# EAGLE board due-adaptor (EAGLE 6.4)
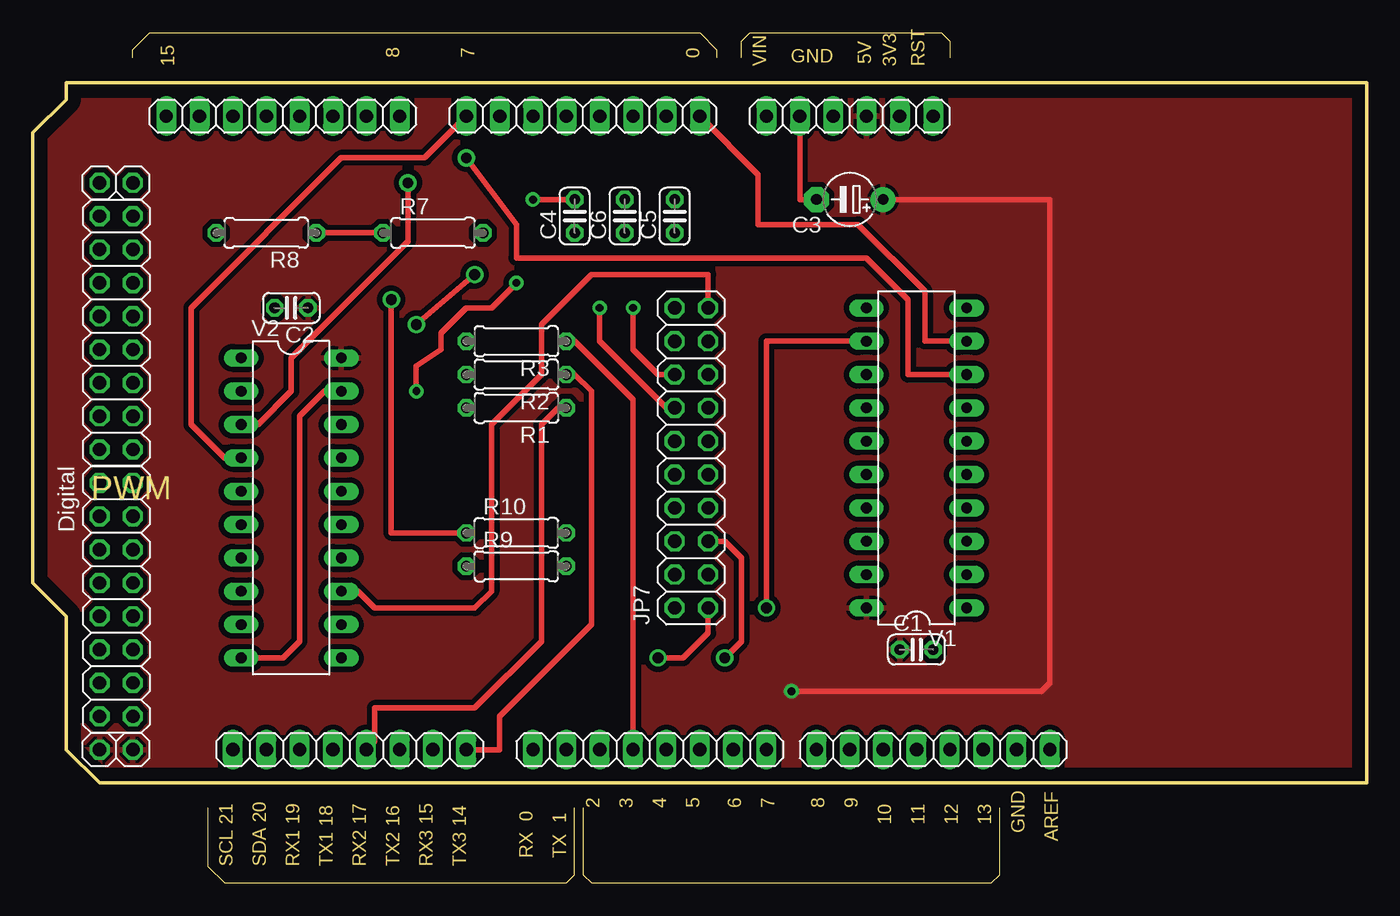
[diagram p0: board, top side]
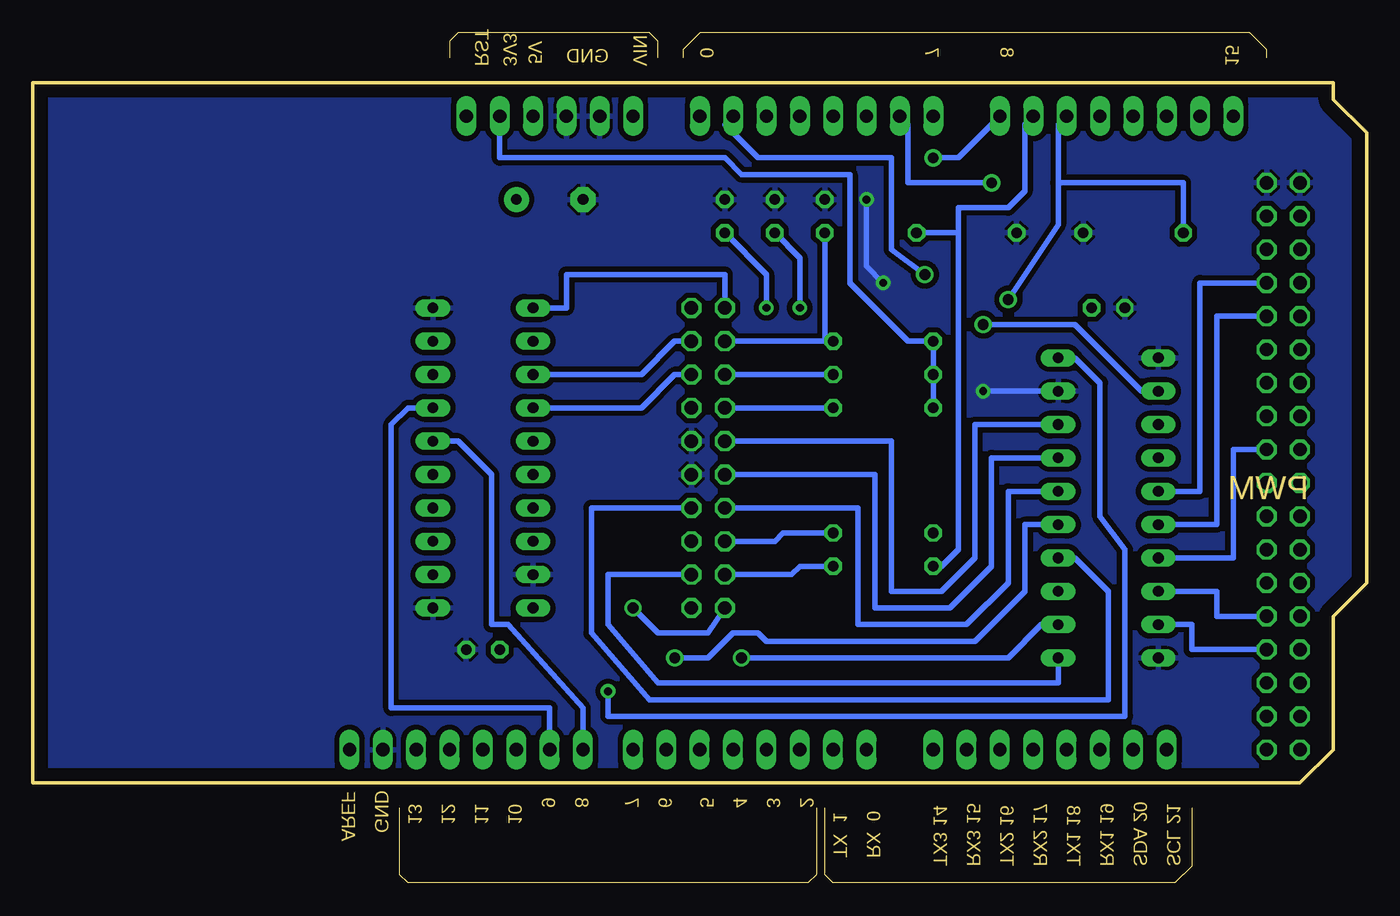
[diagram p1: board, bottom side, seen from below]

Size 101.6 x 64.77 mm. Coordinates in mm from the lower left corner, seen from the top.
Outline: 7.62,62.87 7.62,63.5 8.89,64.77 50.8,64.77 52.07,63.5 52.07,62.87
Outline: 53.98,62.87 53.98,64.14 54.61,64.77 69.22,64.77 69.85,64.14 69.85,62.87
Outline: 13.34,5.71 13.34,1.27 14.61,0 40.64,0 41.27,0.64 41.27,5.71
Outline: 41.91,5.71 41.91,0.64 42.55,0 73.03,0 73.66,0.64 73.66,5.71
Outline: 101.6,7.62 5.08,7.62 2.54,10.16 2.54,20.32 0,22.86 0,57.15 2.54,59.69 2.54,60.96 101.6,60.96 101.6,7.62
Copper layers (1*16): Top 0.035mm / dielectric 1.5mm / Bottom 0.035mm
Design rules "default *": minimum track width 16mil, minimum drill 32mil, track to track 16mil, track to pad 16mil, pad to pad 16mil, via to via 16mil, smd to smd 16mil, copper to edge 40mil, drill to drill 20mil, minimum pad ring 10mil, minimum via ring 10mil, stop-mask expansion 4mil, vias tented up to drill 0mil, thermal gap 10mil
Net classes: 0 default: width 0.203 mm, drill 0.406 mm, clearance 0.203 mm; 1 power: width 0.61 mm, drill 0.711 mm, clearance 0.203 mm; 2 gnd: width 0.305 mm, drill 0.711 mm, clearance 0.203 mm; 3 usbvcc: width 0.508 mm, drill 0.711 mm, clearance 0.203 mm

## Footprints (pad centres in the part's own frame; a part is rotated, then mirrored left to right if it is on the bottom)
1X08 = drill 1.016 long: 1 -8.89,0; 2 -6.35,0; 3 -3.81,0; 4 -1.27,0; 5 1.27,0; 6 3.81,0; 7 6.35,0; 8 8.89,0
C025-024X044 = drill 0.813 octagon: 1 -1.27,0; 2 1.27,0
E5-4 = drill 0.813 pad 1.905: + -2.54,0 | drill 0.813 pad 1.905 octagon: - 2.54,0
2X08 = drill 1.016 octagon: 1 -8.89,-1.27; 2 -8.89,1.27; 3 -6.35,-1.27; 4 -6.35,1.27; 5 -3.81,-1.27; 6 -3.81,1.27; 7 -1.27,-1.27; 8 -1.27,1.27; 9 1.27,-1.27; 10 1.27,1.27; 11 3.81,-1.27; 12 3.81,1.27; 13 6.35,-1.27; 14 6.35,1.27; 15 8.89,-1.27; 16 8.89,1.27
1X01 = drill 1.016 octagon: 1 0,0
2X10 = drill 1.016 octagon: 1 -11.43,-1.27; 2 -11.43,1.27; 3 -8.89,-1.27; 4 -8.89,1.27; 5 -6.35,-1.27; 6 -6.35,1.27; 7 -3.81,-1.27; 8 -3.81,1.27; 9 -1.27,-1.27; 10 -1.27,1.27; 11 1.27,-1.27; 12 1.27,1.27; 13 3.81,-1.27; 14 3.81,1.27; 15 6.35,-1.27; 16 6.35,1.27; 17 8.89,-1.27; 18 8.89,1.27; 19 11.43,-1.27; 20 11.43,1.27
1X06 = drill 1.016 long: 1 -6.35,0; 2 -3.81,0; 3 -1.27,0; 4 1.27,0; 5 3.81,0; 6 6.35,0
0207/7 = drill 0.813 octagon: 1 -3.81,0; 2 3.81,0
DIL20 = drill 0.813 long: 1 -11.43,-3.81; 2 -8.89,-3.81; 3 -6.35,-3.81; 4 -3.81,-3.81; 5 -1.27,-3.81; 6 1.27,-3.81; 7 3.81,-3.81; 8 6.35,-3.81; 9 8.89,-3.81; 10 11.43,-3.81; 11 11.43,3.81; 12 8.89,3.81; 13 6.35,3.81; 14 3.81,3.81; 15 1.27,3.81; 16 -1.27,3.81; 17 -3.81,3.81; 18 -6.35,3.81; 19 -8.89,3.81; 20 -11.43,3.81

## Placement (x,y rotation side)
ADC(H)  [1X08]  19.05,58.42 180 top
ADCL  [1X08]  41.91,58.42 180 top
C1  0.1uF  [C025-024X044]  67.31,17.78 0 top
C2  0.1uF  [C025-024X044]  19.68,43.81 180 top
C3  100uF  [E5-4]  62.23,52.07 180 top
C4  0.1uF  [C025-024X044]  41.27,50.8 90 top
C5  0.1uF  [C025-024X044]  48.89,50.8 90 top
C6  0.1uF  [C025-024X044]  45.09,50.8 90 top
COMMUNICATION  [1X08]  24.13,10.16 0 top
JP1  Digital  [2X08]  6.35,21.59 270 top
JP2  Digital  [2X08]  6.35,41.91 270 top
JP3  [1X01]  7.62,10.16 180 top
JP4  [1X01]  5.08,10.16 180 top
JP5  [1X01]  7.62,53.34 180 top
JP6  [1X01]  5.08,53.34 180 top
JP7  [2X10]  50.16,32.38 90 top
POWER  [1X06]  62.23,58.42 180 top
PWM(H)  [1X08]  68.58,10.16 0 top
PWM(L)  [1X08]  46.99,10.16 0 top
R1  47K  [0207/7]  36.83,36.2 180 top
R2  47K  [0207/7]  36.83,38.73 180 top
R3  47K  [0207/7]  36.83,41.27 180 top
R7  150K  [0207/7]  30.48,49.53 0 top
R8  150K  [0207/7]  17.78,49.53 180 top
R9  100K  [0207/7]  36.83,24.13 0 top
R10  100K  [0207/7]  36.83,26.67 0 top
V1  74HCT541N  [DIL20]  67.31,32.38 90 top
V2  74HCT541N  [DIL20]  19.68,28.57 270 top

## Library data of the parts
ADC(H) ADCL COMMUNICATION JP1-JP7 POWER PWM(H) PWM(L) = pinhead
C1-C6 R1-R3 R7-R10 = rcl
V1 V2 = 74ttl-din

## Nets
+3V3 [power]: POWER.2 R1.2 R2.2 R3.2
+5V [usbvcc]: C1.1 C2.1 C3.+ JP3.1 JP4.1 POWER.3 V1.20 V2.20
ADC0_XSTEP: ADCL.1 V1.9
ADC1_XDIR: ADCL.2 V2.2
ADC2: ADCL.3
ADC3: ADCL.4
ADC4: ADCL.5
ADC5: ADCL.6
ADC6_YSTEP: ADCL.7 V2.3
ADC7_YDIR: ADCL.8 V2.4
ADC8_Z_EN: ADC(H).1 V1.8
ADC9_BED_T: ADC(H).2 R7.2 R9.1
ADC10_E_T: ADC(H).3 R8.2 R10.1
ADC11: ADC(H).4
ADC12: ADC(H).5
ADC13: ADC(H).6
ADC14: ADC(H).7
ADC15: ADC(H).8
AREF: PWM(H).8
DIG22: JP1.16
DIG23: JP1.15
DIG24: JP1.14
DIG25: JP1.13
DIG26_ESTEP [gnd]: JP1.12 V2.9
DIG27: JP1.11
DIG28_EDIR: JP1.10 V2.8
DIG29: JP1.9
DIG30: JP1.8
DIG31: JP1.7
DIG32: JP1.6
DIG33: JP1.5
DIG34: JP1.4
DIG35: JP1.3
DIG36: JP1.2
DIG37: JP1.1
DIG38_XYE_EN: JP2.16 V2.7
DIG39: JP2.15
DIG40: JP2.14
DIG41: JP2.13
DIG42: JP2.12
DIG43: JP2.11
DIG44: JP2.10
DIG45: JP2.9
DIG46_ZSTEP: JP2.8 V2.6
DIG47: JP2.7
DIG48_ZDIR: JP2.6 V2.5
DIG49: JP2.5
DIG50: JP2.4
DIG51: JP2.3
DIG52: JP2.2
DIG53: JP2.1
GND [gnd]: C1.2 C2.2 C3.- C4.2 C5.2 C6.2 JP5.1 JP6.1 JP7.9 JP7.11 POWER.4 POWER.5 PWM(H).7 R7.1 R8.1 V1.1 V1.10 V1.19 V2.1 V2.10 V2.19
N$7: JP7.13
PWM00: PWM(L).1
PWM01: PWM(L).2
PWM02: PWM(L).3
PWM03_XSTOP: C4.1 JP7.18 PWM(L).4 R3.1
PWM04: PWM(L).5
PWM05: PWM(L).6
PWM06: PWM(L).7
PWM07: PWM(L).8
PWM08_BED_H: PWM(H).1 V1.6
PWM09_E_H: PWM(H).2 V1.7
PWM10: PWM(H).3
PWM11: PWM(H).4
PWM12: PWM(H).5
PWM13: PWM(H).6
RESET: POWER.1
RX1_D19: COMMUNICATION.3
RX2_D17_ZSTOP: C6.1 COMMUNICATION.5 JP7.14 R1.1
RX3_D15: COMMUNICATION.7
RX4_D14_YSTOP: C5.1 COMMUNICATION.8 JP7.16 R2.1
S_BED_H: JP7.15 V1.14
S_BED_T: JP7.4 R9.2
S_E_H: JP7.17 V1.13
S_E_T: JP7.6 R10.2
S_EDIR: JP7.1 V2.12
S_ESTEP: JP7.3 V2.11
S_XDIR: JP7.12 V2.18
S_XSTEP: JP7.20 V1.11
S_XYE_EN: JP7.19 V2.13
S_YDIR: JP7.8 V2.16
S_YSTEP: JP7.10 V2.17
S_Z_EN: JP7.2 V1.12
S_ZDIR: JP7.5 V2.15
S_ZSTEP: JP7.7 V2.14
SCL_D21: COMMUNICATION.1
SDA_D20: COMMUNICATION.2
TX1_D18: COMMUNICATION.4
TX2_D16: COMMUNICATION.6
VIN [power]: POWER.6

## Tracks (layer width: path | path; a pad name or v marks a point on that pad's centre or on a via)
+3V3
  Bottom 0.406: R1.2 R2.2 R3.2 34.92,41.27 39.37,45.72 39.37,53.98 47.62,53.98 48.89,55.24 66.04,55.24 POWER.2
+5V  (via drill 0.6)
  Top 0.406: C3.+ 77.47,52.07 77.47,15.24 76.83,14.61 v57.78,14.61
  Bottom 0.406: v57.78,14.61 57.78,12.7 18.41,12.7 18.41,25.4 20.32,27.94 20.32,38.1 22.22,40.01 V2.20
  pour Top: -1.27,60.96 -1.27,6.99 103.5,6.99 103.5,60.96
ADC0_XSTEP
  Top 0.406: V1.9 67.94,41.27 67.94,45.09 62.86,50.16 55.24,50.16 55.24,53.98 ADCL.1
ADC1_XDIR  (via drill 0.81)
  Top 0.406: v33.66,46.35 v29.21,42.55
  Bottom 0.406: V2.2 17.14,37.47 22.22,42.55 v29.21,42.55 | ADCL.2 48.89,57.78 46.35,55.24 36.2,55.24 36.2,48.26 v33.66,46.35
ADC6_YSTEP  (via drill 0.81)
  Top 0.406: V2.3 17.14,34.93 19.68,37.47 19.68,40.01 28.57,48.89 v28.57,53.34
  Bottom 0.406: v28.57,53.34 34.92,53.34 34.92,57.78 ADCL.7
ADC7_YDIR
  Top 0.406: V2.4 14.61,32.38 12.07,34.93 12.07,43.81 23.49,55.24 29.84,55.24 ADCL.8
ADC8_Z_EN  (via drill 0.81)
  Top 0.406: V1.8 66.67,38.73 66.67,44.45 63.5,47.62 36.83,47.62 36.83,50.16 v33.02,55.24
  Bottom 0.406: ADC(H).1 31.12,55.24 v33.02,55.24
ADC9_BED_T
  Bottom 0.406: 31.12,49.53 31.12,51.44 27.3,51.44 26.04,52.7 26.04,57.78 ADC(H).2 | 31.12,49.53 31.12,25.4 32.38,24.13 R9.1 | R7.2 31.12,49.53
ADC10_E_T  (via drill 0.81)
  Top 0.406: R10.1 27.3,26.67 v27.3,44.45
  Bottom 0.406: v27.3,44.45 23.49,50.16 23.49,53.34 | 23.49,53.34 23.49,57.78 ADC(H).3 | R8.2 13.97,53.34 23.49,53.34
DIG26_ESTEP
  Bottom 0.406: JP1.12 13.34,17.78 13.34,19.68 V2.9
DIG28_EDIR
  Bottom 0.406: JP1.10 11.43,20.32 11.43,22.23 V2.8
DIG38_XYE_EN
  Bottom 0.406: V2.7 10.16,24.77 10.16,33.02 JP2.16
DIG46_ZSTEP
  Bottom 0.406: V2.6 11.43,27.3 11.43,43.18 JP2.8
DIG48_ZDIR
  Bottom 0.406: V2.5 12.7,29.84 12.7,45.72 JP2.6
GND  (via drill 0.6)
  Top 0.406: C3.- 58.42,52.07 POWER.5 | V2.10 19.05,17.14 20.32,18.41 20.32,35.56 22.22,37.47 V2.19 | R8.1 R7.1 | v29.21,37.47 29.21,39.37 31.12,40.64 31.12,41.91 33.02,43.81 34.92,43.81 v36.83,45.72 | C4.2 v38.1,52.07
  Bottom 0.406: V2.19 v29.21,37.47 | v38.1,52.07 38.1,46.99 v36.83,45.72
  pour Bottom: 0,60.96 102.23,60.96 102.23,6.99 -0.64,6.99 -0.64,8.89
PWM03_XSTOP
  Top 0.406: PWM(L).4 45.72,36.83 41.27,41.27 R3.1
  Bottom 0.406: JP7.18 41.27,41.27 | 41.27,41.27 R3.1 | C4.1 41.27,41.27
PWM08_BED_H
  Bottom 0.406: V1.6 69.22,33.66 66.67,31.11 66.67,19.68 65.41,19.68 59.69,13.34 PWM(H).1
PWM09_E_H
  Bottom 0.406: V1.7 73.03,36.2 74.3,34.93 74.3,13.34 62.23,13.34 PWM(H).2
RX2_D17_ZSTOP  (via drill 0.6)
  Top 0.406: COMMUNICATION.5 26.04,10.79 26.04,13.34 33.66,13.34 38.73,18.41 38.73,34.93 40,36.2 R1.1 | v43.18,43.81 43.18,41.27 48.26,36.2 JP7.14
  Bottom 0.406: JP7.14 R1.1 | C6.1 43.18,47.62 v43.18,43.81
RX4_D14_YSTOP  (via drill 0.6)
  Top 0.406: R2.1 41.27,38.73 42.55,37.47 42.55,19.68 35.56,12.7 35.56,10.16 COMMUNICATION.8 | v45.72,43.81 45.72,40.64 47.62,38.73 JP7.16
  Bottom 0.406: JP7.16 R2.1 | C5.1 45.72,46.35 v45.72,43.81
S_BED_H
  Bottom 0.406: V1.14 55.24,36.2 52.7,38.73 JP7.15
S_BED_T
  Bottom 0.406: R9.2 43.18,24.13 43.81,23.5 JP7.4
S_E_H
  Bottom 0.406: V1.13 55.24,38.73 52.7,41.27 JP7.17
S_E_T
  Bottom 0.406: R10.2 44.45,26.67 45.09,26.04 JP7.6
S_EDIR  (via drill 0.81)
  Top 0.406: v47.62,17.14 49.53,17.14 51.44,19.05 JP7.1
  Bottom 0.406: V2.12 24.77,19.68 27.3,17.14 v47.62,17.14
S_ESTEP
  Bottom 0.406: V2.11 23.49,15.24 53.98,15.24 57.78,19.68 57.78,23.5 JP7.3
S_XDIR
  Bottom 0.406: V2.18 29.84,34.93 29.84,24.77 32.38,22.23 36.2,22.23 36.2,33.66 JP7.12
S_XSTEP
  Bottom 0.406: JP7.20 48.89,46.35 60.96,46.35 60.96,43.81 V1.11
S_XYE_EN
  Top 0.406: V2.13 24.77,22.23 26.04,20.96 33.66,20.96 34.92,22.23 34.92,34.93 38.73,38.73 38.73,42.55 42.55,46.35 51.44,46.35 JP7.19
S_YDIR
  Bottom 0.406: V2.16 27.3,29.84 27.3,22.86 30.48,19.68 38.73,19.68 38.73,28.57 JP7.8
S_YSTEP
  Bottom 0.406: V2.17 28.57,32.38 28.57,24.13 31.75,20.96 37.46,20.96 37.46,31.11 JP7.10
S_Z_EN  (via drill 0.81)
  Top 0.406: V1.12 55.88,41.27 v55.88,20.96
  Bottom 0.406: v55.88,20.96 53.98,19.05 50.16,19.05 JP7.2
S_ZDIR  (via drill 0.81)
  Top 0.406: v52.7,17.14 53.98,18.41 53.98,24.77 52.7,26.04 JP7.5
  Bottom 0.406: v52.7,17.14 50.16,17.14 48.26,19.05 46.35,19.05 45.72,18.41 29.84,18.41 26.04,22.23 26.04,27.3 V2.15
S_ZSTEP
  Bottom 0.406: V2.14 22.22,24.77 19.68,22.23 19.68,13.97 54.61,13.97 59.05,19.05 59.05,28.57 JP7.7

## Text on the board
Dimension: 3V3 | GND | 5V | 8 | 7 | 0 | 15 | VIN | RST | PWM | 2 | 3 | 4 | 5 | 6 | 7 | 8 | 9 | 10 | 11 | 12 | 13 | GND | AREF | RX 0 | TX 1 | SCL 21 | SDA 20 | RX1 19 | TX1 18 | RX2 17 | TX2 16 | RX3 15 | TX3 14
tOrigins: Analog In | Power
Document: reprappro.com | Design: Adrian | Arduino Due RepRap Interface Shield | Licence: GPL